# Altium PCB MilliNut.PcbDoc
Units mm, origin at the board's own origin, x right, y up, seen from the top; angles counter-clockwise.
Board outline 32 x 50 mm, 2 copper layers (Top Layer, Bottom Layer), stack 0.871 mm thick; 24 components, 33 nets, 126 pads, 17 vias.
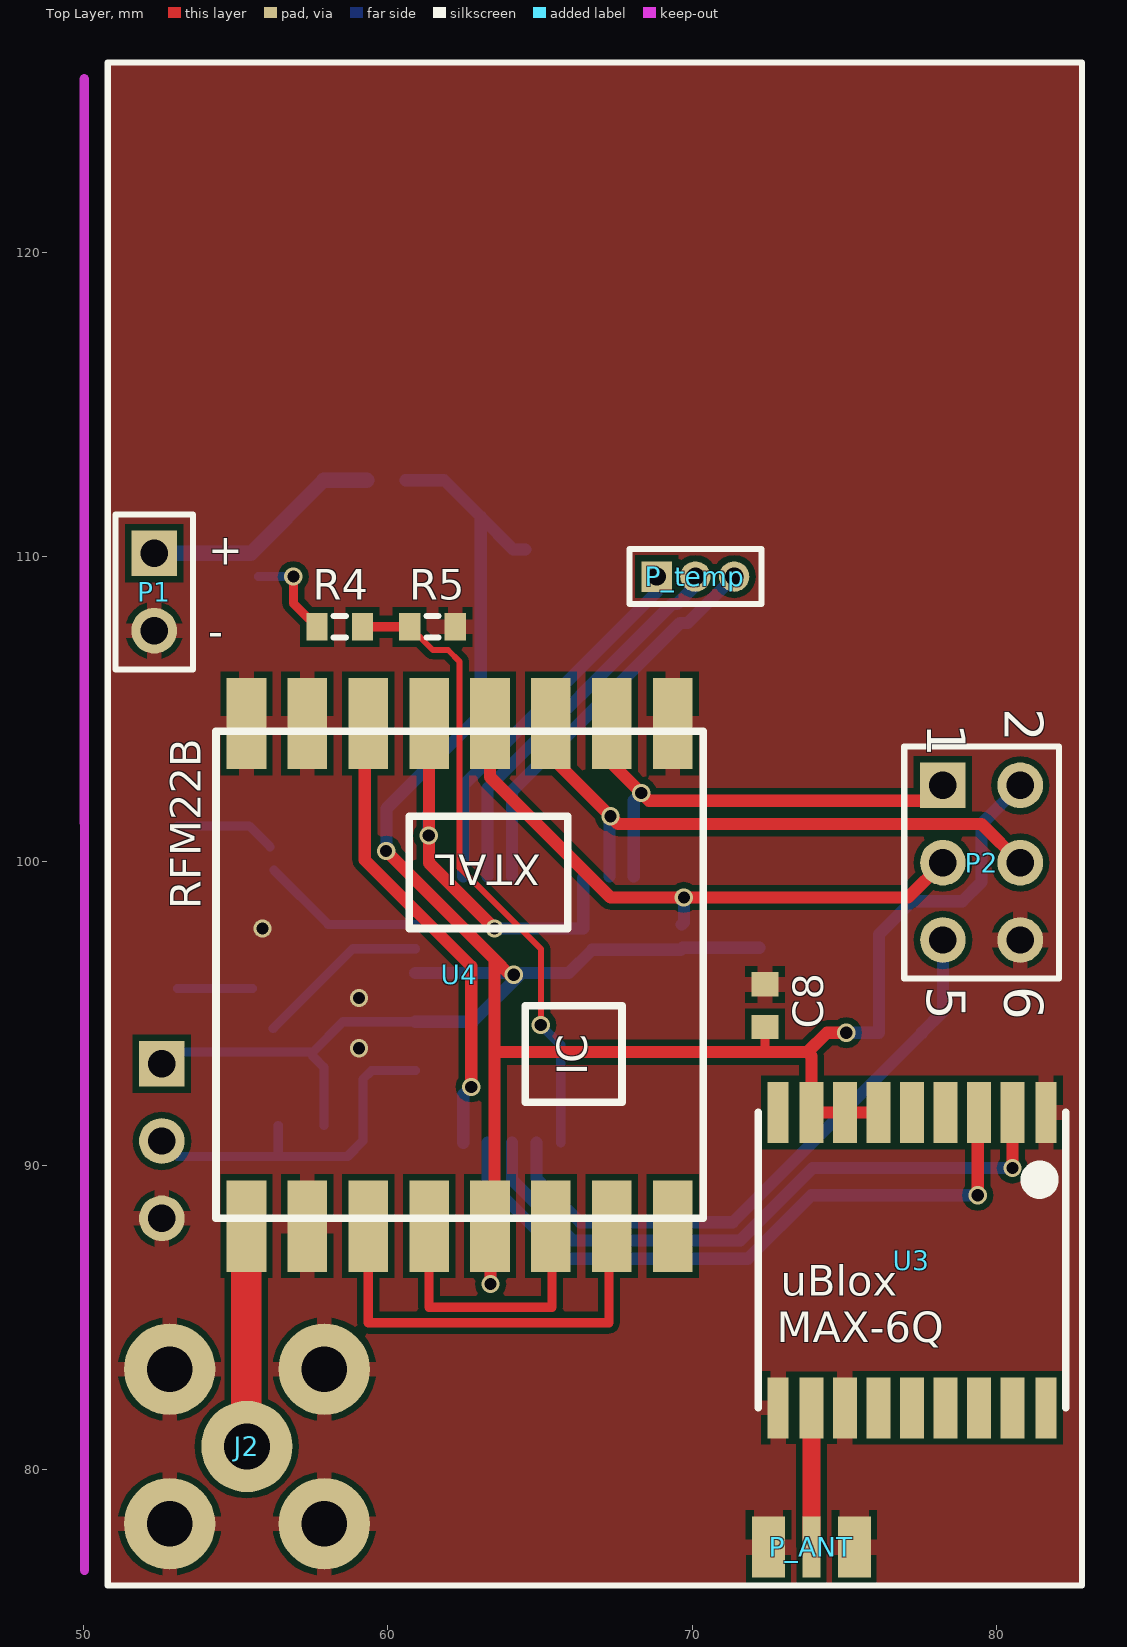
[diagram p0: Top Layer view]
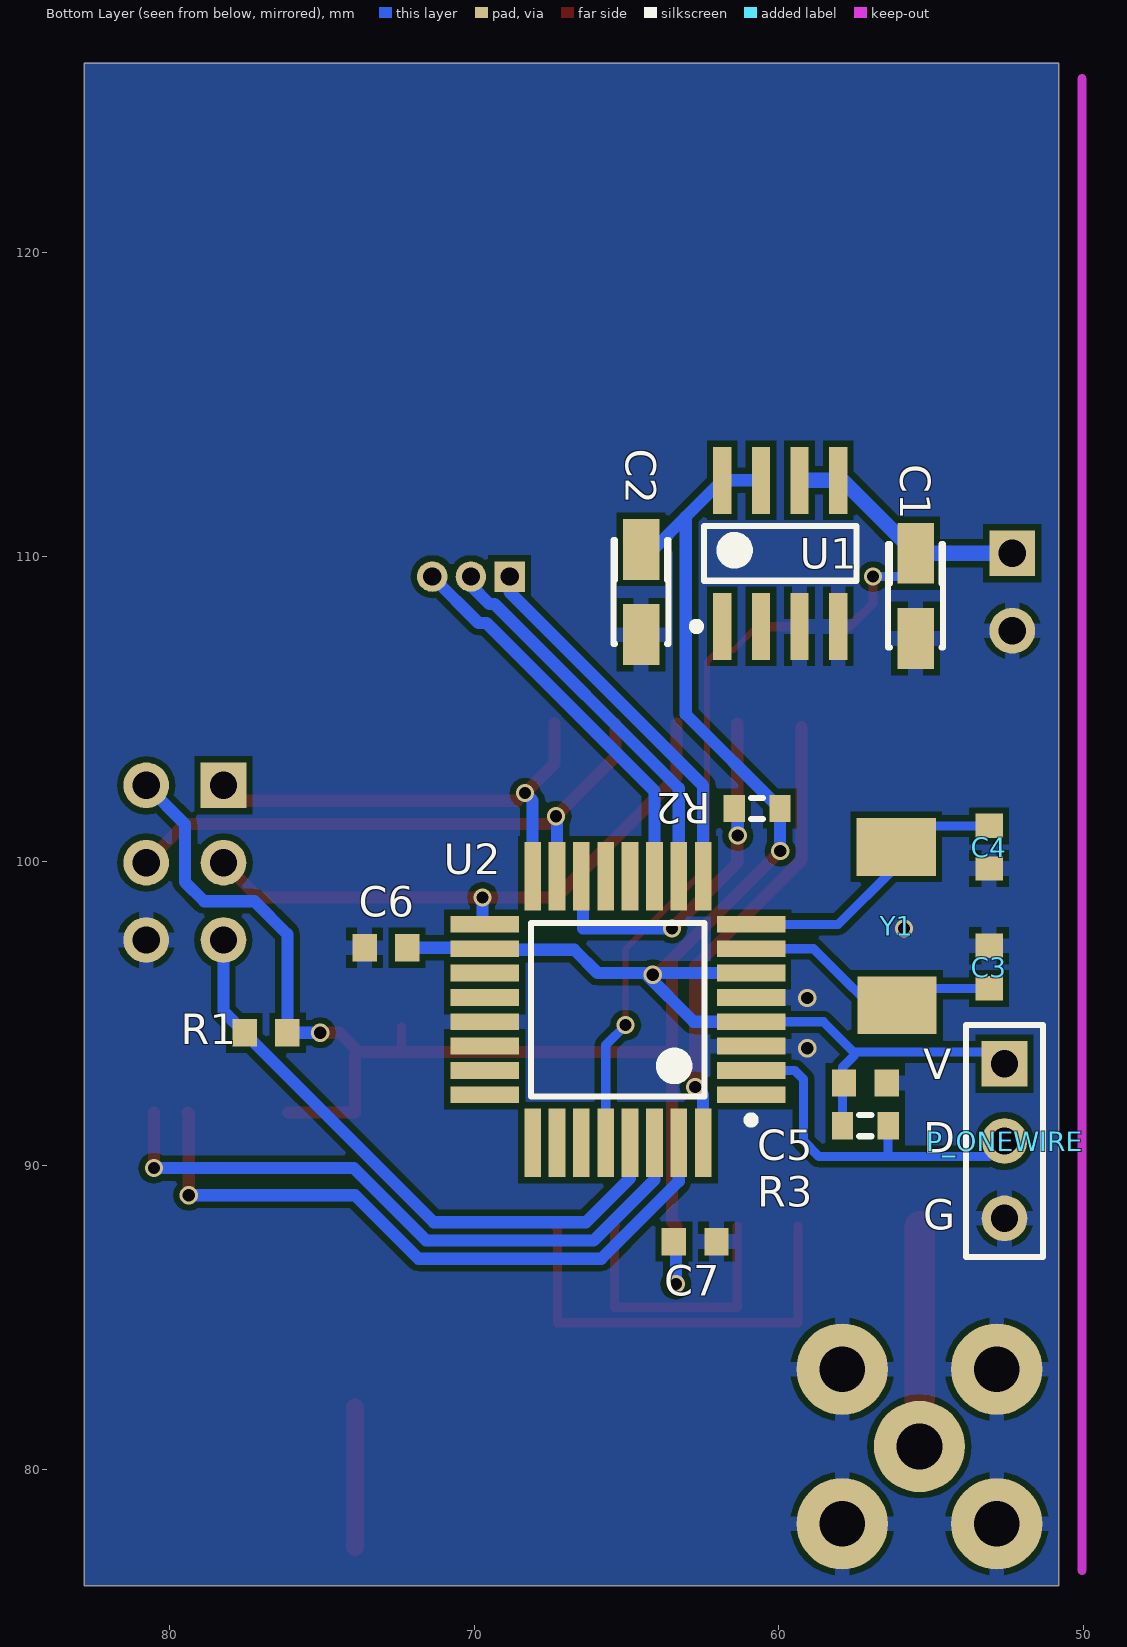
[diagram p1: Bottom Layer view, seen from below]

## Layer stack, top to bottom
Top Layer: signal copper 0.0356
Dielectric: core 0.8, FR-4, Dk 4.8
Bottom Layer: signal copper 0.0356

## Board outline
50.8,76.2 82.8,76.2 82.8,126.2 50.8,126.2

## Design rules (kind name [scope] priority, off if disabled: settings)
Clearance [All] p1: gap=0.2
ComponentClearance [All] p1 off: gap=0.254 collisioncheckmode=3 verticalgap=0.254 showdistances=FALSE
PolygonConnect PolygonConnect_1 [IsVia] p1: connectstyle=Direct reliefconductorwidth=0.254 reliefentries=4 polygonreliefangle="90 Angle"
PolygonConnect [All] p2: connectstyle=Relief reliefconductorwidth=0.5 reliefentries=4 polygonreliefangle="90 Angle"
RoutingVias [All] p1: holewidth=0.6 width=0.8 viastyle="Through Hole" minholewidth=0.711 minwidth=1.27 maxholewidth=0.711 maxwidth=1.27
SilkscreenOverComponentPads [All] p1: minsilkscreentomaskgap=0.254
SolderMaskExpansion [All] p1: expansion=0.102
Width [All] p1: maxlimit=3 minlimit=0.2 preferedwidth=0.3
26 further rules are at their usual default settings.

## Components (designator, comment, footprint, x,y, rotation, side; value= is the part's Value field where it differs from the comment)
C1 "T491A" A 55.499,108.712 r270 bottom
C2 "T491A" A 64.516,108.839 r270 bottom
C3 "C0805" 1608[0603] 53.086,96.52 r270 bottom
C4 "C0805" 1608[0603] 53.086,100.457 r90 bottom
C5 "Cap Semi" 1608[0603] 57.15,92.71 r0 bottom
C6 "Cap Semi" 1608[0603] 72.898,97.155 r180 bottom
C7 "Cap Semi" 1608[0603] 62.738,87.503 r0 bottom
C8 "Cap Semi" 1608[0603] 72.39,95.25 r270 top
J2 "SMA_L" "CON SMA PCB 90" 55.372,80.772 r180 top
P1 "Power" HDR1X2 52.324,110.109 r270 top
P2 "ISP" HDR2X3 78.232,102.489 r270 top
P_ANT "Sarantel GeoHelix Antenna" "Sarantel SL1202RH" 73.914,77.47 r180 top
P_ONEWIRE "Header 3" HDR1X3 52.578,93.345 r270 bottom
P_temp "MHDR1X3" MHDR1X3 68.834,109.347 r0 top
R1 "Res3" 1608[0603] 76.835,94.361 r180 bottom
R2 "Res3" J1-0603 60.706,101.727 r180 bottom
R3 "Res3" J1-0603 57.15,91.313 r180 bottom
R4 "Res3" J1-0603 58.42,107.696 r180 top
R5 "Res3" J1-0603 61.468,107.696 r180 top
U1 "TPS76633" TPS76633 59.944,110.109 r90 bottom
U2 "ATMega328P" TQFP32 65.278,95.123 r0 bottom
U3 "uBlox MAX-6Q" MAX-6Q 77.216,82.042 r90 top
U4 "RFM22B" RFM22B 54.356,88.265 r90 top
Y1 "8MHz" ABM3_XTAL 56.007,99.568 r270 bottom

## Footprints (in the part's own frame and the unit in brackets; to place one, negate y for a bottom-side part, rotate by r counter-clockwise, add the part's x,y. Pads: shape width x height; smd on the part's side, far side on the other; paste and mask are expansions set on the pad)
1608[0603] [mm] "Chip Capacitor, Body 1.6x0.8mm, IPC High Density"
  rect 0.8x0.9 smd: 1(-0.7,0) 2(0.7,0)
  body extent -0.87,-0.48 0.87,0.48, height 1.3
A [mm] "Capacitor, SM Tantalum; Body 3.2 x 1.6 mm (LxW typ)"
  rect 2x1.2 smd: 1(-1.4,0) 2(1.4,0)
  silkscreen extent -1.7,-0.9 1.7,0.9
ABM3_XTAL [mm]
  rect 1.9x2.6 smd: 1(-0.9,-0.125) 2(4.3,-0.1)
  body extent -1.4,-1.95 4.8,1.75, height 1.34
"CON SMA PCB 90" [mm] "UofA Lib Pavel"
  round 3 hole 1.5: 1(0,0) 2(-2.54,2.54) 2(-2.54,-2.54) 2(2.54,2.54) 2(2.54,-2.54)
HDR1X2 [mm] "Connector; Header; 2 Position"
  rect 1.5x1.5 hole 0.9: 1(0,0)
  round 1.5 hole 0.9: 2(2.54,0)
  silkscreen extent -1.27,-1.27 3.81,1.27
HDR1X3 [mm] "Connector; Header; 3 Position"
  rect 1.5x1.5 hole 0.9: 1(0,0)
  round 1.5 hole 0.9: 2(2.54,0) 3(5.08,0)
  silkscreen extent -1.27,-1.27 6.35,1.27
HDR2X3 [mm] "Connector; Header; 3x2 Position"
  rect 1.5x1.5 hole 0.9: 1(0,0)
  round 1.5 hole 0.9: 2(0,2.54) 3(2.54,0) 4(2.54,2.54) 5(5.08,0) 6(5.08,2.54)
  silkscreen extent -1.27,-1.27 6.35,3.81
J1-0603 [mm] "Chip Resistor, Body 1.6x0.8mm, IPC High Density"
  rect 0.7x0.9 smd: 1(-0.75,0) 2(0.75,0)
  silkscreen extent -0.2,-0.35 0.2,0.35, body extent -0.85,-0.48 0.85,0.48, height 0.9
MAX-6Q [mm]
  rect 2x0.7 smd: 1(9.7,-4.4) 9(9.7,4.4) 10(0,4.4) 18(0,-4.4)
  rect 2x0.8 smd: 2(9.7,-3.3) 3(9.7,-2.2) 4(9.7,-1.1) 5(9.7,0) 6(9.7,1.1) 7(9.7,2.2) 8(9.7,3.3) 11(0,3.3) 12(0,2.2) 13(0,1.1) 14(0,0) 15(0,-1.1) 16(0,-2.2) 17(0,-3.3)
  silkscreen extent 0,-5.05 9.7,5.05
MHDR1X3 [mm] "Connector; Header; 3 Position"
  rect 1x1 hole 0.6: 1(0,0)
  round 1 hole 0.6: 2(1.27,0) 3(2.54,0)
  silkscreen extent -0.9,-0.9 3.44,0.9
RFM22B [mm]
  rect 3x1.3 smd: 1(-0.254,-1) 2(-0.254,-3) 3(-0.254,-5) 4(-0.254,-7) 5(-0.254,-9) 6(-0.254,-11) 7(-0.254,-13) 8(-0.254,-15) 9(16.256,-15) 10(16.256,-13) 11(16.256,-11) 12(16.256,-9) 13(16.256,-7) 14(16.256,-5) 15(16.256,-3) 16(16.256,-1)
  silkscreen extent 0,-16 16,0
"Sarantel SL1202RH" [mm]
  rect 0.6x2 smd: 1(0,0) 2(-1.651,0) 2(-1.17,0) 3(1.17,0) 3(1.651,0)
  Mechanical 1 keep-out lines w0.254: -1.988,1.143 cw(c-3.788,1.143) -5.588,1.143
  body extent -6.61,-6.65 6.66,22.85, height 6.82
TPS76633 [mm] "SOIC, 8-Leads, Body 5.0x4.0mm (max), Pitch 1.27mm, IPC Medium Density"
  rect 2.2x0.6 smd: 1(-2.4,1.905) 2(-2.4,0.635) 3(-2.4,-0.635) 4(-2.4,-1.905) 5(2.4,-1.905) 6(2.4,-0.635) 7(2.4,0.635) 8(2.4,1.905)
  silkscreen extent -2.52,-2.5 0.9,2.88, body extent -2,-2.5 2,2.5, height 1.75
TQFP32 [mm] "TQFP, 32-Leads, Body 7.3x9.3mm (max), Pitch 0.80mm, IPC Medium Density"
  rect 2.25x0.55 smd: 1(-4.375,2.8) 2(-4.375,2) 3(-4.375,1.2) 4(-4.375,0.4) 5(-4.375,-0.4) 6(-4.375,-1.2) 7(-4.375,-2) 8(-4.375,-2.8) 17(4.375,-2.8) 18(4.375,-2) 19(4.375,-1.2) 20(4.375,-0.4) 21(4.375,0.4) 22(4.375,1.2) 23(4.375,2) 24(4.375,2.8)
  rect 0.55x2.25 smd: 9(-2.8,-4.375) 10(-2,-4.375) 11(-1.2,-4.375) 12(-0.4,-4.375) 13(0.4,-4.375) 14(1.2,-4.375) 15(2,-4.375) 16(2.8,-4.375) 25(2.8,4.375) 26(2,4.375) 27(1.2,4.375) 28(0.4,4.375) 29(-0.4,4.375) 30(-1.2,4.375) 31(-2,4.375) 32(-2.8,4.375)
  silkscreen extent -4.5,-2.85 2.85,3.75, body extent -3.5,-3.5 3.5,3.5, height 1.2

## Part data
C1 C2: "Solid Tantalum Chip Capacitor, Standard T491 Series - Industrial Grade"
C3 C4: "Ceramic Chip Capacitor - Standard"
C5 C6 C7 C8: "Capacitor (Semiconductor SIM Model)"
J2: "Power Connector"
P1: library part "Header 2", "Header, 2-Pin"
P2: library part "Header 3X2", "Header, 3-Pin, Dual row"
P_ONEWIRE P_temp: "Header, 3-Pin"
R1 R2 R3 R4 R5: "Resistor"
U4: library part RFM22B-S2
Y1: library part ECS-110-S-1, "Crystal Oscillator"

## Via types
v1: diameter 0.6, hole 0.4, Top Layer to Bottom Layer, tented both sides, 17 vias

## Nets (pads, with @x,y where several pads share a name; then routed paths per layer and width w, separated by ;. In a path a pad name is that pad's centre, name@x,y a point inside that pad or via, vN(x,y) a via of type N, cw(c..) or ccw(c..) an arc to the next point about the centre after c; other vN are vias at no path point)
ADC6: U2.19
ADC7: U2.22
GND: C1.2 C2.2 C3.1 C4.1 C5.1 C6.1 C7.1 C8.1 J2.2 P1.2 P2.6 P_ANT.2 P_ANT.3 P_ONEWIRE.3 R5.1 U1.3 U1.4 U2.3 U2.5 U2.21 U3.1 U3.10 U3.12 U4.2 U4.9 U4.15 U4.16
  other v1: 59.055,93.853 59.055,95.504 55.88,97.79
MISO: P2.1 U2.16 U4.10 | length 15
  Top Layer w0.4: U4.10 67.356,103.205 v1(68.326,102.235) 68.58,101.981 P2.1@77.724,101.981
  Bottom Layer w0.4: U2.16 68.078,101.987 v1(68.326,102.235)
MOSI: P2.4 U2.15 U4.11 | length 19.9
  Top Layer w0.4: U4.11 65.356,103.427 v1(67.31,101.473) 67.564,101.219 79.502,101.219 P2.4
  Bottom Layer w0.4: U2.15 67.278,101.441 v1(67.31,101.473)
NetJ2_1: J2.1 U4.1 | length 7.2
  Top Layer w1: U4.1 55.356,80.788 J2.1
NetP_ANT_1: P_ANT.1 U3.11 | length 4.6
  Top Layer w0.6: P_ANT.1@73.916,77.472 U3.11
NetU4_3: U4.3 U4.7 | length 14.3
  Top Layer w0.3: U4.3 59.356,84.836 67.263,84.836 67.263,87.918 U4.7
NetU4_4: U4.4 U4.6 | length 9.4
  Top Layer w0.3: U4.4 61.356,85.344 65.39,85.344 65.39,87.977 U4.6
PB0: U2.12
PB1: U2.13
PB2: R2.1 U2.14 U4.13 | length 13
  Top Layer w0.4: U4.13 61.356,99.934 v1(63.5,97.79)
  Bottom Layer w0.4: v1(61.341,100.838) R2.1@61.341,101.612 ; v1(63.5,97.79) 66.421,97.79 U2.14@66.421,99.441
PC0: U2.23
PC1: U2.24
PC2: U2.25
PC3: U2.26
PC4: U2.27
PC5: R4.1 R5.2 U2.28 | length 20.8
  Top Layer w0.2: R5.2 61.48,106.934 61.976,106.934 62.357,106.553 62.357,99.782 65.024,97.115 v1(65.024,94.615)
  Top Layer w0.3: R4.1 R5.2
  Bottom Layer w0.3: v1(65.024,94.615) 65.678,93.961 U2.28
PD0: U2.30 U3.2 | length 21.3
  Top Layer w0.4: U3.2 80.518,91.74 v1(80.518,89.916)
  Bottom Layer w0.4: U2.30 64.078,89.534 66.074,87.538 71.576,87.538 73.954,89.916 v1(80.518,89.916)
PD1: U2.31 U3.3 | length 22
  Top Layer w0.4: v1(79.375,89.027) 79.375,91.701 U3.3
  Bottom Layer w0.4: U2.31 63.278,89.485 65.825,86.938 71.825,86.938 73.914,89.027 v1(79.375,89.027)
PD2: U2.32 U4.14 | length 15.2
  Top Layer w0.4: U4.14@59.244,104.409 59.244,100.04 62.738,96.546 v1(62.738,92.583)
  Bottom Layer w0.4: U2.32 62.478,92.323 v1(62.738,92.583)
PD3: U2.1
PD4: P_ONEWIRE.2 R3.2 U2.2 | length 11.2
  Bottom Layer w0.3: P_ONEWIRE.2@53.086,90.297 56.388,90.297 ; R3.2 56.4,90.309 56.388,90.297 ; U2.2 59.468,93.123 59.182,92.837 59.182,90.805 58.674,90.297 56.388,90.297
PD5: P_temp.1 U2.9 | length 12.5
  Bottom Layer w0.4: U2.9 62.478,102.483 68.834,108.839 P_temp.1
PD6: P_temp.2 U2.10 | length 12.8
  Bottom Layer w0.4: U2.10 63.278,102.394 69.331,108.447 69.5,108.447 70.104,109.051 P_temp.2
PD7: P_temp.3 U2.11 | length 13
  Bottom Layer w0.4: U2.11 64.078,102.305 69.596,107.823 69.853,107.823 71.374,109.344 P_temp.3
RST: P2.5 R1.1 U2.29 | length 20.3
  Bottom Layer w0.4: U2.29 64.878,89.582 66.322,88.138 71.328,88.138 77.535,94.345 R1.1 78.232,95.058 P2.5
SCK: P2.3 U2.17 U4.12 | length 19.7
  Top Layer w0.4: U4.12 63.356,102.76 67.31,98.806 v1(69.723,98.806) 77.089,98.806 P2.3
  Bottom Layer w0.4: U2.17 69.723,97.993 v1(69.723,98.806)
V_REF: U2.20
VBATT: C1.1 P1.1 R4.2 U1.5 U1.6 | length 11.1
  Top Layer w0.3: v1(56.896,109.347) 56.896,108.47 R4.2
  Bottom Layer w0.3: C1.1@55.753,109.347 v1(56.896,109.347)
  Bottom Layer w0.5: P1.1 52.327,110.112 C1.1 57.896,112.509 U1.5 U1.6
VCC: C2.1 C5.2 C6.2 C7.2 C8.2 P2.2 P_ONEWIRE.1 R1.2 R2.2 R3.1 U1.7 U1.8 U2.4 U2.6 U2.18 U3.6 U3.7 U3.8 U4.5 | length 91.1
  Top Layer w0.3: 72.39,93.726 C8.2
  Top Layer w0.4: v1(59.944,100.33) 63.5,96.774 ; v1(63.373,86.106) 63.373,87.994 U4.5 63.5,88.155 63.5,93.726 ; v1(64.135,96.266) 64.008,96.266 63.5,96.774 ; v1(75.057,94.361) 74.422,94.361 73.787,93.726 ; U3.6 U3.7 U3.8 73.916,93.597 73.787,93.726 ; 63.5,93.726 72.39,93.726 73.787,93.726 ; 63.5,93.726 63.5,96.774
  Bottom Layer w0.3: P_ONEWIRE.1@52.959,93.726 57.531,93.726 ; R3.1 57.9,93.23 57.531,93.599 57.531,93.726 ; U2.4 58.528,94.723 57.531,93.726
  Bottom Layer w0.4: P_ONEWIRE.1 P_ONEWIRE.1@52.767,93.156 ; v1(59.944,100.33) 59.956,100.342 R2.2 63.049,104.82 63.049,111.309 ; U1.7 U1.8 63.049,111.309 ; U2.4 62.789,94.723 v1@64.389,96.323 ; U2.6 v1@64.389,96.323 ; v1(63.373,86.106) 63.373,87.438 C7.2 ; C2.1 64.119,110.239 63.049,111.309 ; C6.2 69.685,97.155 U2.18 69.62,97.09 66.711,97.09 65.944,96.323 v1@64.389,96.323 ; v1(75.057,94.361) R1.2 76.135,97.598 77.216,98.679 78.867,98.679 79.502,99.314 79.502,101.219 P2.2
XTAL1: C3.2 U2.7 Y1.2 | length 8.2
  Bottom Layer w0.3: C3.2 Y1.2@55.555,95.82 ; Y1.2@56.234,94.506 58.851,97.123 U2.7
XTAL2: C4.2 U2.8 Y1.1 | length 8.7
  Bottom Layer w0.3: C4.2 55.443,101.157 Y1.1 ; Y1.1@56.259,99.706 58.042,97.923 U2.8
pads on no net: U1.1 U1.2 U3.4 U3.5 U3.9 U3.13 U3.14 U3.15 U3.16 U3.17 U3.18 U4.8

## Polygon pours and split planes (outlines as drawn)
GND on Bottom Layer "Top Layer-No Net" (solid, pour order 4): 50.8,76.2 50.8,126.238 82.804,126.238 82.804,76.2
GND on Top Layer "Top Layer-No Net" (solid, pour order 2): 50.8,76.2 82.804,76.2 82.804,126.238 50.8,126.238

## Keep-outs
Keep-Out Layer:
  lines w0.3: 50.03,125.7 50.038,76.708

## Silkscreen, mask and mechanical layers (free items; w line width, h text height)
Top Overlay:
  lines w0.2: 50.8,76.2 50.8,126.238 82.804,126.238 82.804,76.2 50.8,76.2
  text "+" at 54.102,109.728 h1
  text "-" at 54.102,107.061 h1
  text "uBlox" at 72.898,85.725 h1
  text "MAX-6Q" at 72.771,84.201 h1
Bottom Overlay:
  text "V" at 55.245,92.837 h1
  text "D" at 55.245,90.424 h1
  text "G" at 55.245,87.884 h1
Drill Drawing:
  text ".LEGEND" at 87.88,81.28 h1.52
  text "Drill Drawing." at 87.88,78.74 h1.52

## Dimensions
50.03,125.7 to 50.038,76.708 on Mechanical 1
50.8,76.2 to 82.804,75.946 on Mechanical 1

## Text inside footprints (layer, text, board x,y; h text height)
P2: Top Overlay "1" at 77.724,104.521 h1.27 r270; Top Overlay "2" at 80.264,105.029 h1.27 r270; Top Overlay "5" at 77.724,95.885 h1.27 r270; Top Overlay "6" at 80.264,95.885 h1.27 r270
U4: Top Overlay "XTAL" at 65.024,100.203 h1 r180; Top Overlay "IC" at 66.548,92.964 h1 r90